# Altium PCB ArtFire_Status.PcbDoc
Units mm, origin at the board's own origin, x right, y up, seen from the top; angles counter-clockwise.
Board outline 152.4 x 101.6 mm, 2 copper layers (Top Layer, Bottom Layer); 6 components, 7 nets, 26 pads, 0 vias.
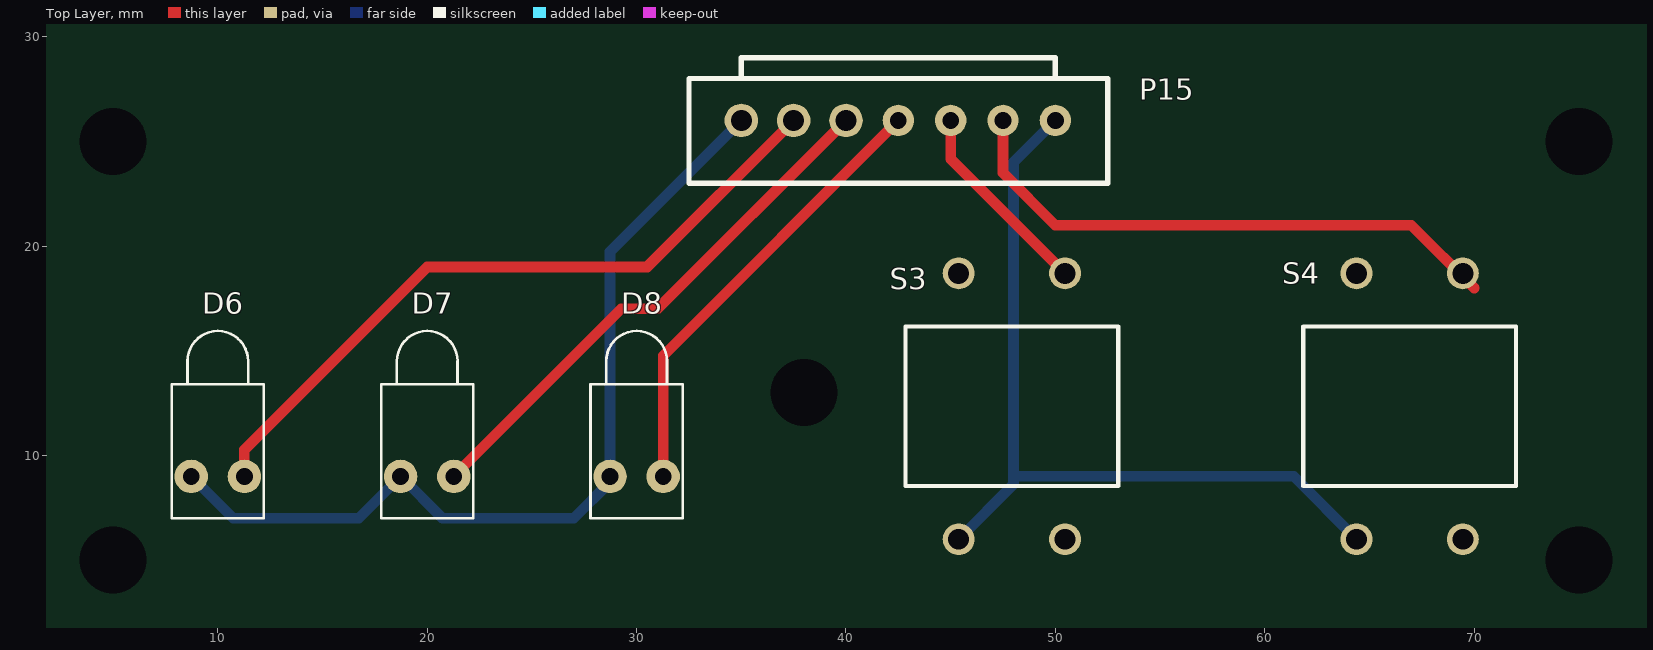
[diagram p0: Top Layer view]
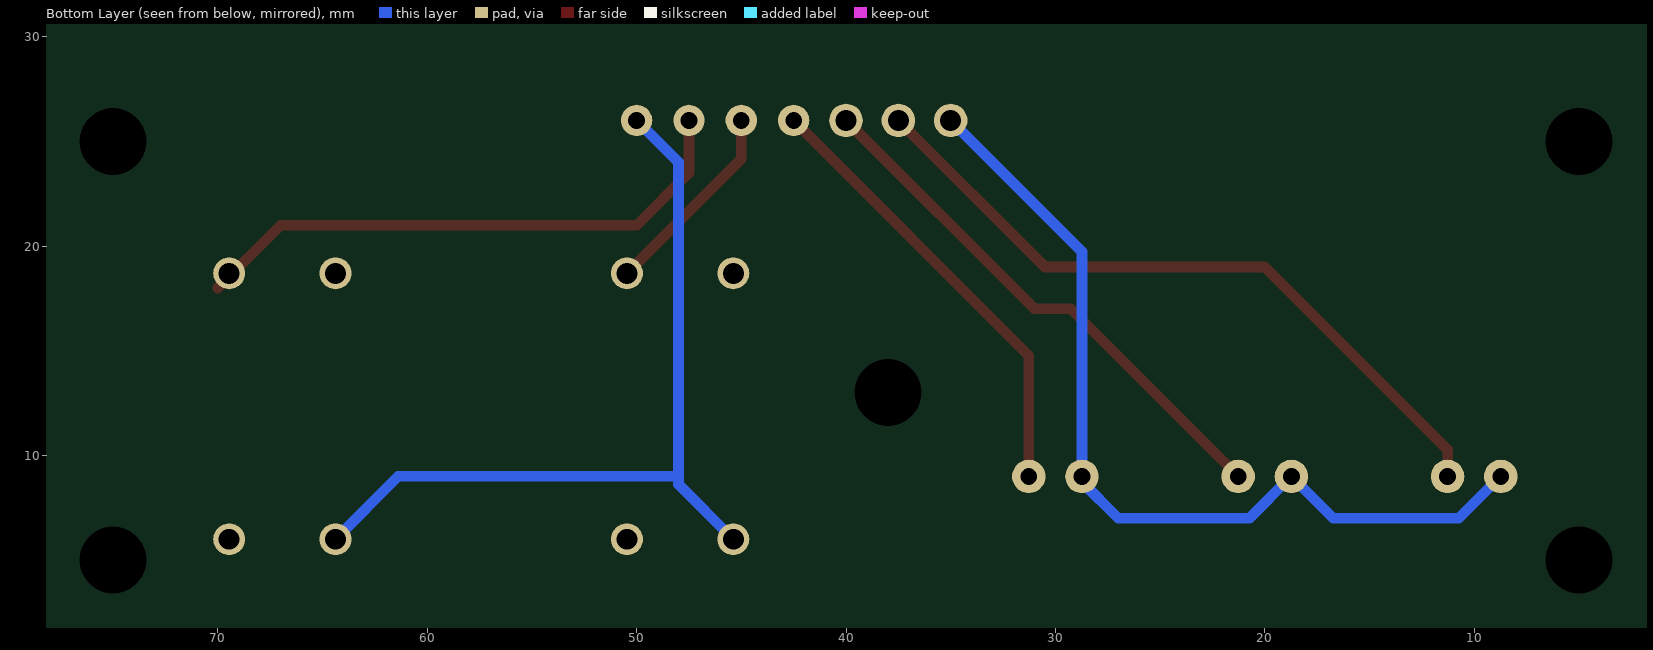
[diagram p1: Bottom Layer view, seen from below]

## Layer stack, top to bottom
Top Solder: solder mask 0.0102, Solder Resist, Dk 3.5
Top Layer: signal copper 0.0356
Dielectric 1: dielectric 0.32, FR-4, Dk 4.8
Bottom Layer: signal copper 0.0356
Bottom Solder: solder mask 0.0102, Solder Resist, Dk 3.5

## Board outline
0,0 152.4,0 152.4,101.6 0,101.6

## Design rules (kind name [scope] priority, off if disabled: settings)
Clearance [All] p1: gap=0.152
MinimumSolderMaskSliver [All] p1: minsoldermaskwidth=0.025
PolygonConnect [All] p1: connectstyle=Relief reliefconductorwidth=0.254 reliefentries=4 polygonreliefangle="90 Angle" airgapwidth=0.254
RoutingVias [All] p1: holewidth=0.254 width=0.457 viastyle="Through Hole" minholewidth=0.254 minwidth=0.457 maxholewidth=10 maxwidth=10
SilkToBoardRegionClearance [All] p1 off:
SilkToSilkClearance [All] p1 off: silktosilkclearance=0.254
SilkToSolderMaskClearance [IsPad] p1: minsilkscreentomaskgap=0 clearancetoexposedcopper=TRUE
SolderMaskExpansion [All] p1: expansion=0.102
UnpouredPolygon [All] p1: allowunpoured=FALSE
Width [All] p1: maxlimit=10 minlimit=0.25 preferedwidth=0.25
25 further rules are at their usual default settings.

## Components (designator, comment, footprint, x,y, rotation, side; value= is the part's Value field where it differs from the comment)
D6 "RED" LED-1 10,9 r90 top
D7 "YELLOW" LED-1 20,9 r90 top
D8 "GREEN" LED-1 30,9 r90 top
P15 "XH2.54-7P" XH2.54-7P 35,26 r0 top
S3 "SW-PB" KEY_B 53,6 r90 top
S4 "SW-PB" KEY_B 72,6 r90 top

## Footprints (in the part's own frame and the unit in brackets; to place one, negate y for a bottom-side part, rotate by r counter-clockwise, add the part's x,y. Pads: shape width x height; smd on the part's side, far side on the other; paste and mask are expansions set on the pad)
KEY_B [mil]
  round 60 hole 39.37: 1(0,300) 2(500,100) 3(500,300) 4(0,100)
  silkscreen extent 100,0 400,400
LED-1 [mm] "LED; 2 Leads"
  round 1.6 hole 0.8: 1(0,1.27) 2(0,-1.27)
  silkscreen extent -2,-2.2 6.95,2.2
XH2.54-7P [mm]
  round 1.6 hole 1: 1(0,0) 2(2.5,0) 3(5,0)
  round 1.5 hole 0.8: 4(7.5,0) 5(10,0) 6(12.5,0) 7(15,0)
  silkscreen extent -2.5,-3 17.5,3

## Part data
D6 D7 D8: library part LED1, "Typical RED GaAs LED"
S3 S4: "Switch"

## Free pads (board coordinates)
  round 2.54 hole 3.2: 0(75,25) 1(5,25) 2(38,13) 3(5,5) 4(75,5)

## Nets (pads, with @x,y where several pads share a name; then routed paths per layer and width w, separated by ;. In a path a pad name is that pad's centre, name@x,y a point inside that pad or via, vN(x,y) a via of type N, cw(c..) or ccw(c..) an arc to the next point about the centre after c; other vN are vias at no path point)
+3.3V: D6.1 D7.1 D8.1 P15.1 | length 43.1
  Bottom Layer w0.508: D6.1 10.73,7 16.73,7 D7.1 20.73,7 27,7 28.73,8.73 D8.1 28.73,19.73 P15.1
NetD6_2: D6.2 P15.2 | length 34
  Top Layer w0.508: D6.2 11.27,10.27 20,19 30.5,19 P15.2
NetD7_2: D7.2 P15.3 | length 25.8
  Top Layer w0.508: D7.2 29.27,17 31,17 P15.3
NetD8_2: D8.2 P15.4 | length 21.7
  Top Layer w0.508: D8.2 31.27,14.77 P15.4
NetP15_5: P15.5 S3.2 | length 9.6
  Top Layer w0.508: P15.5 45,24.16 S3.2
NetP15_6: P15.6 S4.2 | length 27.3
  Top Layer w0.508: P15.6 47.5,23.5 50,21 67,21 70,18
SGND: P15.7 S3.1 S4.1 | length 39.5
  Bottom Layer w0.508: S3.1 48,8.62 48,9 ; P15.7 48,24 48,9 ; S4.1 61.38,9 48,9
pads on no net: S3.3 S3.4 S4.3 S4.4

## Silkscreen, mask and mechanical layers (free items; w line width, h text height)
Mechanical 1:
  lines w0.254: 0,0 0,30 80,30 80,0 0,0